# EAGLE board ESP8266_1wire_Gateway (EAGLE 7.5.0)
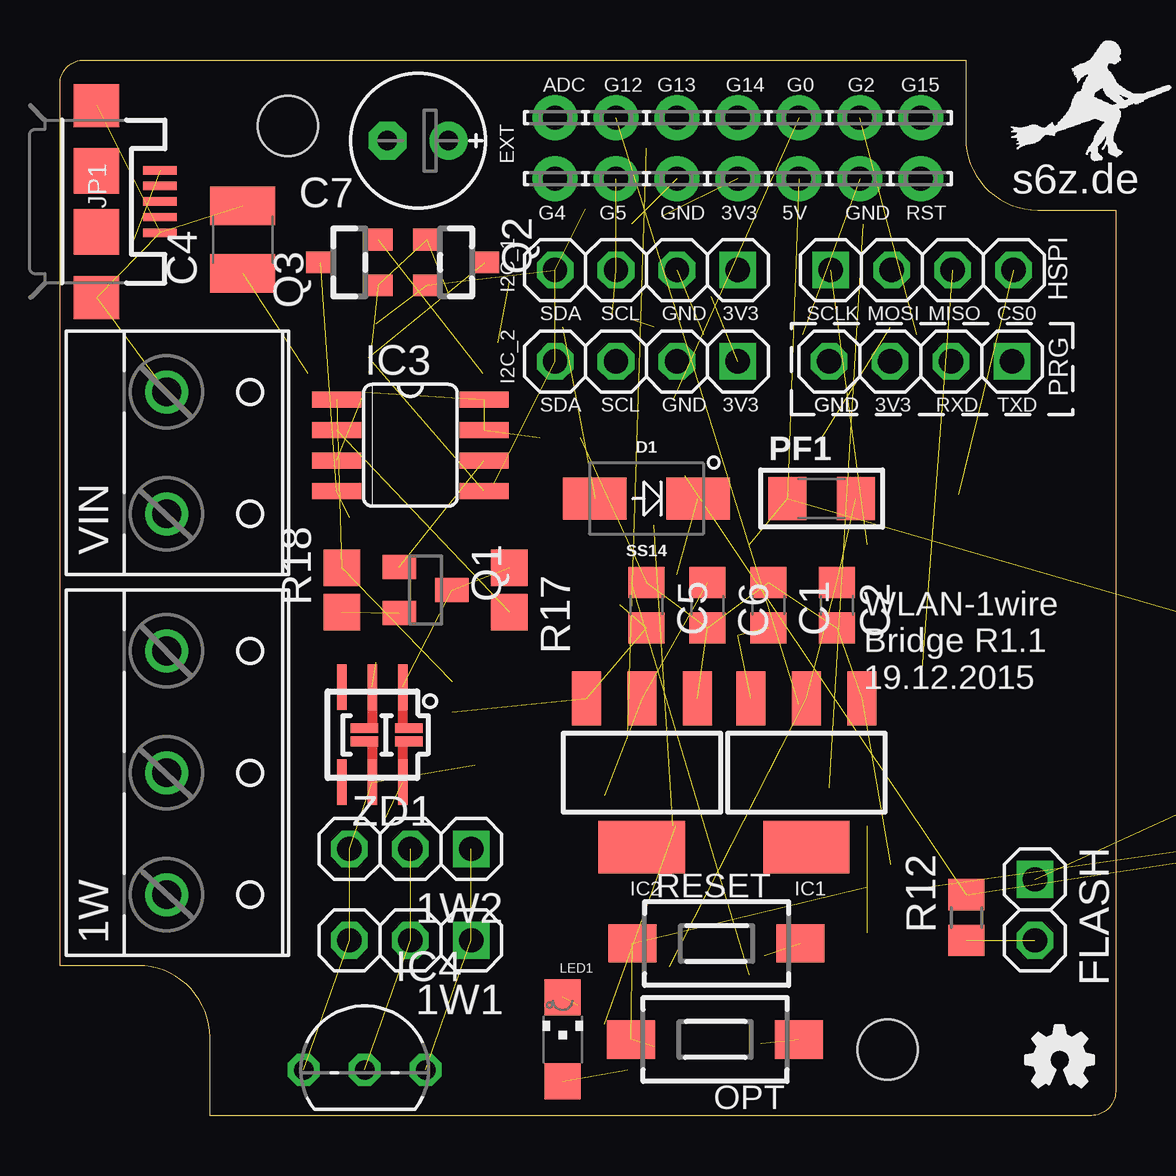
[diagram p0: board, top side]
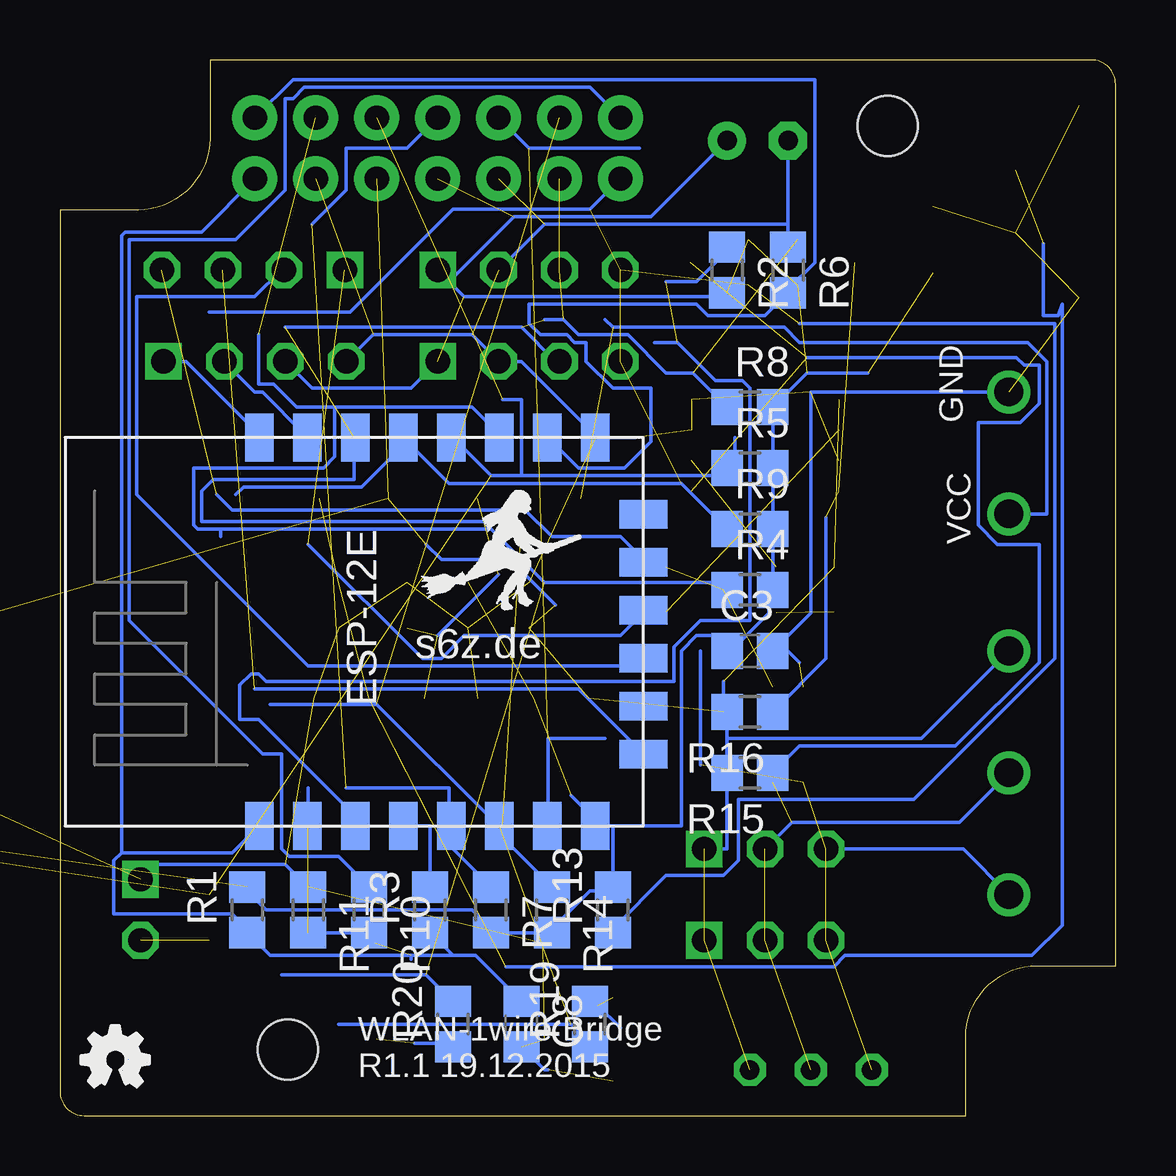
[diagram p1: board, bottom side, seen from below]

Size 44 x 44 mm. Coordinates in mm from the lower left corner, seen from the top.
Outline: 0,6.25 0,43 arc-90 1,44 37.75,44 37.75,40.75 arc90 40.75,37.75 44,37.75 44,1 arc-90 43,0 6.25,0 6.25,3.25 arc90 3.25,6.25 0,6.25
Copper layers (1*16): Top 0.035mm / dielectric 1.5mm / Bottom 0.035mm
Design rules "ITEADstudio_DRC": minimum track width 6mil, minimum drill 12mil, track to track 6mil, track to pad 6mil, pad to pad 6mil, via to via 6mil, smd to smd 0mil, copper to edge 10mil, drill to drill 10mil, minimum pad ring 10mil, minimum via ring 6mil, stop-mask expansion 2mil, vias tented up to drill 100mil, thermal gap 10mil
Holes 2.5 mm at 34.5,2.75 9.5,41.25

## Footprints (pad centres in the part's own frame; a part is rotated, then mirrored left to right if it is on the bottom)
W237-133 = drill 1.194: 1 -5.08,-0.635; 2 0,-0.635; 3 5.08,-0.635
1X03 = drill 1.016 square: 1 -2.54,0 | drill 1.016 octagon: 2 0,0; 3 2.54,0
LSP10 = drill 1.016 pad 1.88: 1 0,0
C0805 = smd 1.3 x 1.5: 1 -0.95,0; 2 0.95,0
C1210 = smd 1.6 x 2.7: 1 -1.4,0; 2 1.4,0
E2,5-6E = drill 0.813 pad 1.575: + -1.27,0 | drill 0.813 pad 1.575 octagon: - 1.27,0
DO214 = smd 2.65 x 1.75: ANODE -2.15,0; CATHODE 2.15,0
1X02 = drill 1.016 square: 1 -1.27,0 | drill 1.016 octagon: 2 1.27,0
1X04 = drill 1.016 square: 1 -3.81,0 | drill 1.016 octagon: 2 -1.27,0; 3 1.27,0; 4 3.81,0
SOT223 = smd 1.219 x 2.235: 1 -2.311,-3.099; 2 0,-3.099; 3 2.311,-3.099 | smd 3.6 x 2.2: 4 0,3.099
SO08 = smd 0.66 x 2.032: 1 -1.905,-3.073; 2 -0.635,-3.073; 3 0.635,-3.073; 4 1.905,-3.073; 5 1.905,3.073; 6 0.635,3.073; 7 -0.635,3.073; 8 -1.905,3.073
TO92- = drill 0.813 octagon: 1 -2.54,0; 2 0,0; 3 2.54,0
USB-MICROB = smd 0.35 x 1.4: D+ 0,2.65; D- -0.65,2.65; GND 1.3,2.65; ID 0.65,2.65; VBUS -1.3,2.65 | smd 1.8 x 1.9: MT1 -4,0; MT2 4,0 | smd 1.9 x 1.9: P$1 -1.27,0; P$2 1.27,0
CHIPLED_1206 = smd 1.5 x 1.5: A 0,-1.75; C 0,1.75
ESP8266-ESP12E = smd 2 x 1.2: 1 0,16; 2 0,14; 3 0,12; 4 0,10; 5 0,8; 6 0,6; 7 0,4; 8 0,2; 9 16.2,2; 10 16.2,4; 11 16.2,6; 12 16.2,8; 13 16.2,10; 14 16.2,12; 15 16.2,14; 16 16.2,16 | smd 1.2 x 2: 17 11,0; 18 3,0; 19 5,0; 20 13,0; 21 7,0; 22 9,0
DTSM-3 = smd 2 x 1.6: 1 -3.494,0; 2 3.494,0
F1206 = smd 1.6 x 1.803: 1 -1.429,0; 2 1.429,0
SOT23 = smd 1 x 1.4: 1 -0.95,-1.1; 2 0.95,-1.1; 3 0,1.1
SOT23' = smd 0.9 x 1.2: 1 -0.95,-1.2; 2 0.95,-1.2; 3 0,1.2
R0805 = smd 1.3 x 1.5: 1 -0.95,0; 2 0.95,0
R0805_SMALL_GAP = smd 1.524 x 1.524: 1 -0.927,0; 2 0.927,0
PAD-JUMPER-2-NO_YES_SILK = smd 0.635 x 1.27: 1 -0.45,0; 2 0.45,0
W237-132 = drill 1.194: 1 -2.54,-0.635; 2 2.54,-0.635
CON_350-104 = drill 1.2 square: A1 -3.75,2.5; B1 -3.75,-2.5 | drill 1.2: A2 -0.25,2.5; A3 3.25,2.5; A4 6.75,2.5; B2 -0.25,-2.5; B3 3.25,-2.5; B4 6.75,-2.5
CON_350-102 = drill 1.2 square: A1 -1.25,2.5; B1 -1.25,-2.5 | drill 1.2: A2 2.25,2.5; B2 2.25,-2.5
TSOC6_BYPASS_J = smd 0.406 x 1.905: 1 -1.27,-1.981; 2 0,-1.981; 3 1.27,-1.981; 4 1.27,1.981; 5 0,1.981; 6 -1.27,1.981 | smd 1.143 x 0.406: 9 -1.524,-0.274; 10 -1.524,0.286; 11 0.33,-0.274; 12 0.33,0.286

## Placement (x,y rotation side)
1W  1Wire  [W237-133]  5.08,14.29 270 top
1W1  [1X03]  14.61,7.3 180 top
1W2  [1X03]  14.61,11.11 180 top
3V3  LSP10  [LSP10]  28.26,39.05 180 top
5V  LSP10  [LSP10]  30.8,39.05 180 top
ADC  LSP10  [LSP10]  20.64,41.59 180 top
C1  105  [C0805]  29.53,21.27 90 top
C2  104  [C0805]  32.38,21.27 270 top
C3  0,1mF  [C0805]  15.24,19.37 0 bottom
C4  100mF  [C1210]  7.62,36.51 90 top
C5  105  [C0805]  24.45,21.27 90 top
C6  104  [C0805]  26.99,21.27 270 top
C7  100uF  [E2,5-6E]  14.92,40.64 180 top
C8  470pF  [C0805]  24.77,3.81 270 bottom
D1  SS14  [DO214]  24.45,25.72 0 top
FLASH  [1X02]  40.64,8.57 270 top
G0  LSP10  [LSP10]  30.8,41.59 180 top
G2  LSP10  [LSP10]  33.34,41.59 180 top
G4  LSP10  [LSP10]  20.64,39.05 180 top
G5  LSP10  [LSP10]  23.18,39.05 180 top
G12  LSP10  [LSP10]  23.18,41.59 180 top
G13  LSP10  [LSP10]  25.72,41.59 180 top
G14  LSP10  [LSP10]  28.26,41.59 180 top
G15  LSP10  [LSP10]  35.88,41.59 180 top
GND  LSP10  [LSP10]  25.72,39.05 180 top
GND1  GND  [LSP10]  33.34,39.05 180 top
HSPI  [1X04]  35.94,35.24 0 top
I2C_1  [1X04]  24.45,35.24 180 top
I2C_2  [1X04]  24.45,31.43 180 top
IC1  5V  [SOT223]  31.11,14.29 180 top
IC2  3.3V  [SOT223]  24.26,14.29 180 top
IC3  DS2482-100S  [SO08]  14.61,27.94 270 top
IC4  DS18B20  [TO92-]  12.7,1.91 0 top
JP1  USB-MICROB  [USB-MICROB]  1.52,38.1 270 top
LED1  CFG  [CHIPLED_1206]  20.95,3.17 0 top
MDL1  µC  [ESP8266-ESP12E]  19.68,12.06 90 bottom
OPT  DTSM-3  [DTSM-3]  27.3,3.17 180 top
PF1  500mA  [F1206]  31.75,25.72 0 top
PRG  [1X04]  35.88,31.43 180 top
Q1  BSS84  [SOT23]  15.24,21.91 270 top
Q2  BSS138  [SOT23']  16.51,35.56 270 top
Q3  BSS138  [SOT23']  12.06,35.56 90 top
Q4  BSS138  [SOT23']  66.04,17.14 0 top  (outside the outline)
R1  10k  [R0805]  36.2,8.57 90 bottom
R2  10k  [R0805]  16.19,35.24 270 bottom
R3  470  [R0805]  28.57,8.57 90 bottom
R4  10k  [R0805]  15.24,21.91 0 bottom
R5  10k  [R0805]  15.24,26.99 0 bottom
R6  10k  [R0805]  13.65,35.24 270 bottom
R7  10k  [R0805]  26.04,8.57 270 bottom
R8  10k  [R0805]  15.24,29.53 0 bottom
R9  10k  [R0805]  15.24,24.45 0 bottom
R10  220k  [R0805]  31.11,8.57 270 bottom
R11  100k  [R0805]  33.66,8.57 270 bottom
R12  470  [R0805]  37.78,8.26 90 top
R13  4k7  [R0805]  20.95,8.57 90 bottom
R14  4k7  [R0805]  23.5,8.57 270 bottom
R15  4k7  [R0805]  15.24,14.29 180 bottom
R16  4k7  [R0805]  15.24,16.83 180 bottom
R17  100  [R0805_SMALL_GAP]  18.73,21.91 270 top
R18  ?  [R0805_SMALL_GAP]  11.75,21.91 90 top
R19  10k  [R0805]  21.91,3.81 90 bottom
R20  470  [R0805]  27.62,3.81 90 bottom
R21  10k  [R0805]  66.04,13.65 0 top  (outside the outline)
R22  10k  [R0805]  63.18,17.14 90 top  (outside the outline)
RESET  DTSM-3  [DTSM-3]  27.37,7.18 0 top
RST  RST  [LSP10]  35.88,39.05 180 top
SJ1  JUMPER-PAD-2-NOYES_SILK  [PAD-JUMPER-2-NO_YES_SILK]  68.9,17.14 0 top  (outside the outline)
U$1  [OSHW_FILLX100_NOTEXT]  43.11,1.2 0 bottom
U$2  [OSHW_FILLX100_NOTEXT]  40.25,1.2 0 top
VIN  7-14  [W237-132]  5.08,27.62 270 top
X1  [CON_350-104]  79.38,9.84 270 top  (outside the outline)
X3  [CON_350-102]  79.38,21.27 270 top  (outside the outline)
ZD1  DS9503_BYPASS_JP  [TSOC6_BYPASS_J]  13.02,15.88 180 top
ZD2  DS9503_BYPASS_JP  [TSOC6_BYPASS_J]  64.77,22.86 0 top  (outside the outline)

## Library data of the parts
1W VIN = my; OC_FARNELL: unknown; OC_NEWARK: unknown
1W1 1W2 3V3 5V ADC FLASH G0 G2 G4 G5 G12-G15 GND GND1 HSPI I2C_1 I2C_2 IC3 IC4 PRG Q2-Q4 R17 R18 RST ZD1 ZD2 = my
C1-C6 C8 R1-R16 R20-R22 = resistor
C7 R19 = rcl
D1 = ihpcb-diode
IC1 IC2 = SparkFun-PowerIC; PROD_ID: VREG-08170
JP1 = SparkFun-Connectors; PROD_ID: CONN-09505
LED1 = led
MDL1 = ESP8266-ESP12E
OPT RESET = mechanics
PF1 = polyswitch
Q1 = transistor-small-signal
SJ1 = SparkFun-Passives
U$1 U$2 = ohw-logo
X1 = my; MPN: 233-104; OC_FARNELL: unknown; OC_NEWARK: 28K9046
X3 = my; MPN: 233-102; OC_FARNELL: unknown; OC_NEWARK: 28K9044

## Nets
1W: IC3.2 R17.2
1W_: Q1.3 R17.1 ZD1.1
1W_1: Q4.3 R22.2 SJ1.1 ZD2.1
1W_ESD: 1W1.2 1W2.2 1W.2 IC4.2 ZD1.6
1WD_ESD: ZD2.6
1WDIR: G0.1 MDL1.12 Q4.2 R5.1 R12.2 R21.2 SJ1.2
5V_IN: C2.1 IC1.2 JP1.VBUS PF1.2
ADC: MDL1.2 R10.2 R11.2
CH_PD: MDL1.3 R2.1
DEEP_SLEEP: MDL1.4 R3.2
GND: C1.2 C2.2 C3.2 C4.2 C5.2 C6.2 C7.- C8.2 FLASH.1 GND1.1 GND.1 I2C_1.2 I2C_2.2 IC1.1 IC2.1 IC3.3 IC3.7 IC3.8 JP1.GND JP1.MT1 JP1.MT2 LED1.A MDL1.9 OPT.2 PRG.4 R6.1 R11.1 RESET.1 VIN.1 ZD1.2 ZD2.2
GND_ESD: 1W1.3 1W2.3 1W.3 IC4.1 ZD1.5
GNDD_ESD: ZD2.5
GPIO13: G13.1 MDL1.7
GPIO14: G14.1 MDL1.5 R7.1
GPIO15: G15.1 MDL1.10 R6.2
HCS0: HSPI.4 MDL1.17
HMISO: HSPI.3 MDL1.18
HMOSI: HSPI.2 MDL1.21
HSCLK: HSPI.1 MDL1.22
LED_OPT: G12.1 MDL1.6 R19.1
N$4: LED1.C R19.2
N$5: ADC.1 R10.1
N$6: IC3.6 Q1.1
N$7: Q1.2 R18.1
N$8: C1.1 D1.CATHODE IC1.3
N$10: FLASH.2 R12.1
N$11: OPT.1 R20.1
RST: C8.1 MDL1.1 R1.1 R3.1 RESET.2 RST.1
RXD: MDL1.15 PRG.2
SCL1: G5.1 I2C_1.3 I2C_2.3 MDL1.14 Q3.2 R8.1 R14.1
SCL2: IC3.4 Q3.3 R16.1
SDA1: G4.1 I2C_1.4 I2C_2.4 MDL1.13 Q2.2 R9.1 R13.1
SDA2: IC3.5 Q2.3 R15.1
SW_OPT: G2.1 MDL1.11 R4.1 R20.2
TXD: MDL1.16 PRG.1
VCC: 3V3.1 C3.1 C4.1 C6.1 C7.+ I2C_1.1 I2C_2.1 IC2.2 MDL1.8 PRG.3 Q2.1 Q3.1 Q4.1 R1.2 R2.2 R4.2 R5.2 R7.2 R8.2 R9.2 R13.2 R14.2 R21.1
VCC_5V: 1W1.1 1W2.1 1W.1 5V.1 C5.1 IC2.3 IC3.1 IC4.3 PF1.1 R15.2 R16.2 R18.2 R22.1
VIN: D1.ANODE VIN.2

## Tracks (layer width: path | path; a pad name or v marks a point on that pad's centre or on a via)
1W  (1 unrouted)
1W_  (2 unrouted)
1W_1  (3 unrouted)
1W_ESD  (3 unrouted)
  Bottom 0.152: 1W.2 6.51,12.22 13.49,12.22 1W2.2
1WDIR  (5 unrouted)
  Bottom 0.152: 15.88,28.26 15.88,26.99 R5.1 16.51,26.67 24.77,26.67 | 24.77,26.67 26.04,26.67 27.62,28.26 MDL1.12 | 24.77,26.67 24.77,29.84 25.56,29.84
5V_IN  (4 unrouted)
  Bottom 0.152: 3.02,36.35 3.02,33.34 2.38,33.34 2.22,33.81 2.22,7.94 3.49,6.67 11.27,6.67 11.75,6.19 25.4,6.19
ADC  (1 unrouted)
  Bottom 0.152: R10.2 32.38,7.62 R11.2 | 33.66,13.65 33.66,12.06 MDL1.2
CH_PD  (1 unrouted)
  Bottom 0.152: 18.73,34.77 17.46,34.77 16.19,36.04 R2.1 | 19.21,32.23 18.26,32.23 16.67,30.64 15.56,30.64 15.24,30.32 15.24,20.64 17.3,20.64 18.41,19.53 18.41,18.1 35.4,18.1 35.72,18.41 36.04,18.41 36.51,17.94 36.51,16.51 35.72,16.51 31.75,12.54 31.75,12.06 MDL1.3
DEEP_SLEEP
  Bottom 0.152: R3.2 28.57,12.06 MDL1.4
GND  (24 unrouted)
  Bottom 0.152: C7.- 13.65,37.15 | 13.65,37.15 R6.1 | 13.97,19.68 12.7,20.95 12.7,30.16 VIN.1 | 13.97,19.68 C3.2 13.97,19.68 | 13.97,19.68 13.18,18.89 | 20,28.26 21.59,28.26 MDL1.9 21.75,28.42 24.77,31.43 I2C_2.2 26.83,32.54 30.96,32.54 PRG.4 | FLASH.1 40.01,10.48 34.61,10.48 R11.1 | 23.65,1.91 23.81,1.91 C8.2 | 13.65,37.15 23.81,37.15 I2C_1.2
  pour Bottom: 52.45,49.78 49.15,49.78 49.15,-0.25 52.45,-0.25
  pour Top: 52.45,49.78 50.42,49.78 50.42,-0.25 52.45,-0.25
GND_ESD  (4 unrouted)
  Bottom 0.152: 17.3,14.61 17.3,19.37 | 1W.3 6.35,11.11 1W2.3
GPIO13  (1 unrouted)
  Bottom 0.152: 21.27,15.72 23.65,15.72 23.65,12.06 MDL1.7 | G13.1 24.45,40.32 19.84,40.32
GPIO14  (1 unrouted)
  Bottom 0.152: R7.1 27.62,11.11 27.62,12.06 MDL1.5 27.78,12.06 27.78,13.65 32.07,13.65 | 33.5,37.15 32.07,38.58 32.07,40.32 29.53,40.32 G14.1
GPIO15
  Bottom 0.152: G15.1 34.29,43.18 12.54,43.18 12.54,35.56 13.65,34.45 R6.2 14.61,33.34 16.99,33.34 17.46,33.81 24.45,33.81 24.45,33.02 23.97,32.54 22.86,32.54 22.54,32.23 22.07,32.23 22.07,31.43 20.95,30.32 19.37,30.32 19.37,28.1 20.48,26.99 22.38,26.99 23.65,28.26 MDL1.10
HCS0  (1 unrouted)
  Bottom 0.152: 37.47,25.88 36.83,25.24 24.61,25.24 23.5,24.13 20.64,24.13 19.68,23.18 MDL1.17
HMISO  (1 unrouted)
  Bottom 0.152: 35.88,17.78 22.38,17.78 19.68,15.08 MDL1.18
HMOSI
  Bottom 0.152: MDL1.21 20,18.73 33.66,18.73 40.8,25.88 40.8,34.13 35.88,34.13 34.77,35.24 HSPI.2
HSCLK  (1 unrouted)
  Bottom 0.152: 33.66,23.81 28.89,19.05 28.1,19.05 27.15,20 20.64,20 19.68,20.95 MDL1.22
LED_OPT  (2 unrouted)
  Bottom 0.152: 32.38,3.81 22.7,3.81 21.91,3.02 R19.1 | 35.24,17.14 30.8,17.14 25.72,12.06 MDL1.6
N$4  (1 unrouted)
  Bottom 0.152: 20.64,3.65 21.59,4.6 21.91,4.6 R19.2
N$5
  Bottom 0.152: ADC.1 21.91,42.86 33.81,42.86 34.29,42.39 34.61,42.39 34.61,38.58 36.67,36.51 41.12,36.51 41.12,20.64 35.56,15.08 34.77,15.08 34.77,11.11 34.45,10.79 32.38,10.79 R10.1
N$6  (1 unrouted)
N$7  (1 unrouted)
N$8  (3 unrouted)
  Bottom 0.152: 28.26,20 25.72,22.54
N$10  (1 unrouted)
N$11  (1 unrouted)
  Bottom 0.152: 29.21,3.02 27.62,3.02 R20.1
RST  (1 unrouted)
  Bottom 0.152: 27.62,6.67 26.67,6.67 C8.1 | 27.62,6.67 R3.1 | 27.62,6.67 29.37,6.67 | 29.37,6.67 35.24,6.67 R1.1 36.2,7.78 36.83,8.41 41.75,8.41 41.75,10.64 41.43,10.95 | 29.37,6.67 29.37,6.51 | 41.43,10.95 36.83,10.95 35.72,12.06 MDL1.1 | RST.1 38.1,36.83 41.27,36.83 41.43,36.67 41.43,10.95
RXD
  Bottom 0.152: PRG.2 35.88,30.16 35.56,30.16 33.81,28.42 MDL1.15
SCL1  (6 unrouted)
  Bottom 0.152: 25.56,12.06 25.56,11.59 R14.1 | 34.61,32.86 24.77,32.86 23.34,31.43 I2C_2.3 | 23.81,33.18 23.02,33.18 22.38,32.54 20.32,32.54 18.73,30.96 17.62,30.96 R8.1 | 24.77,24.61 24.92,24.77 38.1,24.77 38.1,26.04 37.62,26.51 31.75,26.51 31.75,28.26 MDL1.14
SCL2  (2 unrouted)
  Bottom 0.152: 12.06,24.92 12.06,19.05 R16.1
SDA1  (5 unrouted)
  Bottom 0.152: 13.18,33.02 2.54,33.02 2.54,19.05 8.41,13.18 15.72,13.18 15.72,10.64 16.35,10 18.73,10 20.95,7.78 R13.1 | 29.53,28.1 29.69,28.26 MDL1.13 29.53,28.1 | 29.53,28.1 27.78,26.35 18.1,26.35 R9.1 | 36.67,25.88 36.35,26.19 31.43,26.19 29.53,28.1 | G4.1 21.91,37.78 27.62,37.78 31.91,33.5 37.78,33.5
SDA2  (2 unrouted)
  Bottom 0.152: 12.86,31.59 4.13,31.59 3.81,31.27 3.17,31.27 3.17,29.69 3.97,28.89 5.71,28.89 5.71,24.61 4.92,23.81 3.17,23.81 3.17,18.89 6.67,15.4 13.18,15.4 R15.1
SW_OPT  (2 unrouted)
  Bottom 0.152: 37.31,24.45 38.26,24.45 38.42,24.61 38.42,26.99 33.02,26.99 32.54,27.46 32.54,29.53 | 37.31,24.45 26.04,24.45 23.81,22.23 16.51,22.23 R4.1 | 32.54,29.53 26.83,29.53 25.72,28.42 MDL1.11 | 34.77,5.87 28.73,5.87 R20.2 | 37.31,24.45 37.31,24.13 | 35.72,32.54 35.72,30.48 35.08,30.48 34.13,29.53 32.54,29.53
TXD
  Bottom 0.152: PRG.1 38.73,31.43 35.72,28.42 MDL1.16
VCC  (10 unrouted)
  Bottom 0.152: R1.2 36.2,9.37 35.4,8.57 26.83,8.57 26.04,7.78 R7.2 R14.2 23.5,7.78 21.91,9.37 20.95,9.37 R13.2 20.95,12.06 | R8.2 R5.2 | R9.2 R4.2 14.45,21.91 14.45,20.95 16.03,19.37 C3.1 16.83,20 17.46,20 18.1,19.37 18.1,12.06 20.95,12.06 | R9.2 R5.2 | R5.2 | R9.2 | 21.43,12.06 MDL1.8 21.59,12.06 | 21.43,12.06 20.95,12.06 | 21.43,12.06 22.7,13.34 | PRG.3 33.5,30.32 29.37,30.32 I2C_2.1 | 27.78,34.77 27.15,34.13 16.35,34.13 R2.2 | C7.+ 19.37,37.47 25.08,37.47 27.78,34.77 | 27.78,34.77 I2C_1.1 | R8.2 12.86,30.96 10.32,30.96 | R8.2
VCC_5V  (10 unrouted)
  Bottom 0.152: R16.2 16.19,15.72 | 16.19,15.72 R15.2 | 16.35,18.1 16.35,16.83 R16.2 | R16.2 | R15.2 16.19,11.11 1W2.1 | R15.2 | 28.73,23.81 28.1,23.18 25.24,23.18 23.34,21.27 | 1W.1 8.1,15.72 16.19,15.72
VIN  (1 unrouted)
  Bottom 0.152: 21.27,33.18 20.95,32.86 13.81,32.86 13.18,32.23 3.65,32.23 2.86,31.43 2.86,25.08 VIN.2

## Text on the board
tPlace: EXT | s6z.de | GND | RST | SDA | SCL | GND | 3V3 | SCLK | MOSI | MISO | CS0 | SDA | SCL | GND | 3V3 | GND | GND | 3V3 | RXD | TXD | WLAN-1wire / Bridge R1.1 / 19.12.2015
bPlace: GND | VCC | s6z.de | WLAN-1wire Bridge / R1.1 19.12.2015
tStop: s6z.de
Document: DS_1551R